# Altium PCB boma.pcbdoc
Units mm, origin at the board's own origin, x right, y up, seen from the top; angles counter-clockwise.
Board outline 31.69 x 34.81 mm, 2 copper layers (Top Layer, Bottom Layer); 1 components, 0 nets, 4 pads, 0 vias.
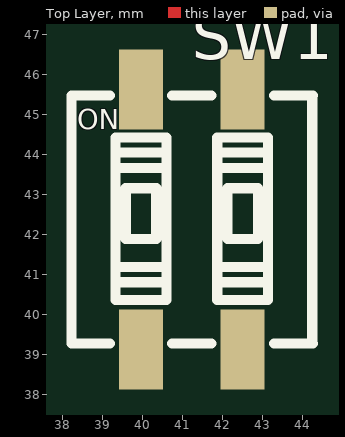
[diagram p0: Top Layer view]
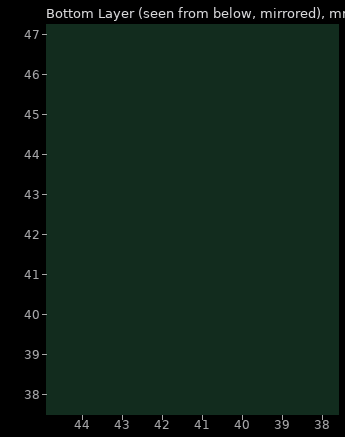
[diagram p1: Bottom Layer view, seen from below]

## Layer stack, top to bottom
Top Layer: signal copper (thickness not stored)
Dielectric: dielectric 0.32, FR-4, Dk 4.8
Bottom Layer: signal copper (thickness not stored)

## Board outline
57.093,25.4 25.4,25.4 25.4,60.211 57.093,60.211

## Components (designator, comment, footprint, x,y, rotation, side; value= is the part's Value field where it differs from the comment)
SW1 "SW-SMD_4P-L6.0-W6.2-P2.54-LS7.8" SW-SMD_4P-L6.0-W6.2-P2.54-LS7.8 41.237,42.367 r0 top

## Footprints (in the part's own frame and the unit in brackets; to place one, negate y for a bottom-side part, rotate by r counter-clockwise, add the part's x,y. Pads: shape width x height; smd on the part's side, far side on the other; paste and mask are expansions set on the pad)
SW-SMD_4P-L6.0-W6.2-P2.54-LS7.8 [mm]
  rect 1.1x2 smd: 1(-1.27,-3.25) 2(1.27,-3.25) 3(1.27,3.25) 4(-1.27,3.25)
  silkscreen extent -3.01,-3.1 3.03,3.1

## Nets (pads, with @x,y where several pads share a name; then routed paths per layer and width w, separated by ;. In a path a pad name is that pad's centre, name@x,y a point inside that pad or via, vN(x,y) a via of type N, cw(c..) or ccw(c..) an arc to the next point about the centre after c; other vN are vias at no path point)
pads on no net: SW1.1 SW1.2 SW1.3 SW1.4

## Silkscreen, mask and mechanical layers (free items; w line width, h text height)
Document:
  lines w0.003: 41.221,42.78 41.272,42.831

## Text inside footprints (layer, text, board x,y; h text height)
SW1: Top Overlay "ON" at 38.377,44.617 h0.5